# Altium PCB FixBoard.PcbDoc
Units mm, origin at the board's own origin, x right, y up, seen from the top; angles counter-clockwise.
Board outline 70 x 70 mm, 2 copper layers (Top Layer, Bottom Layer); 1 components, 8 nets, 17 pads, 19 vias.
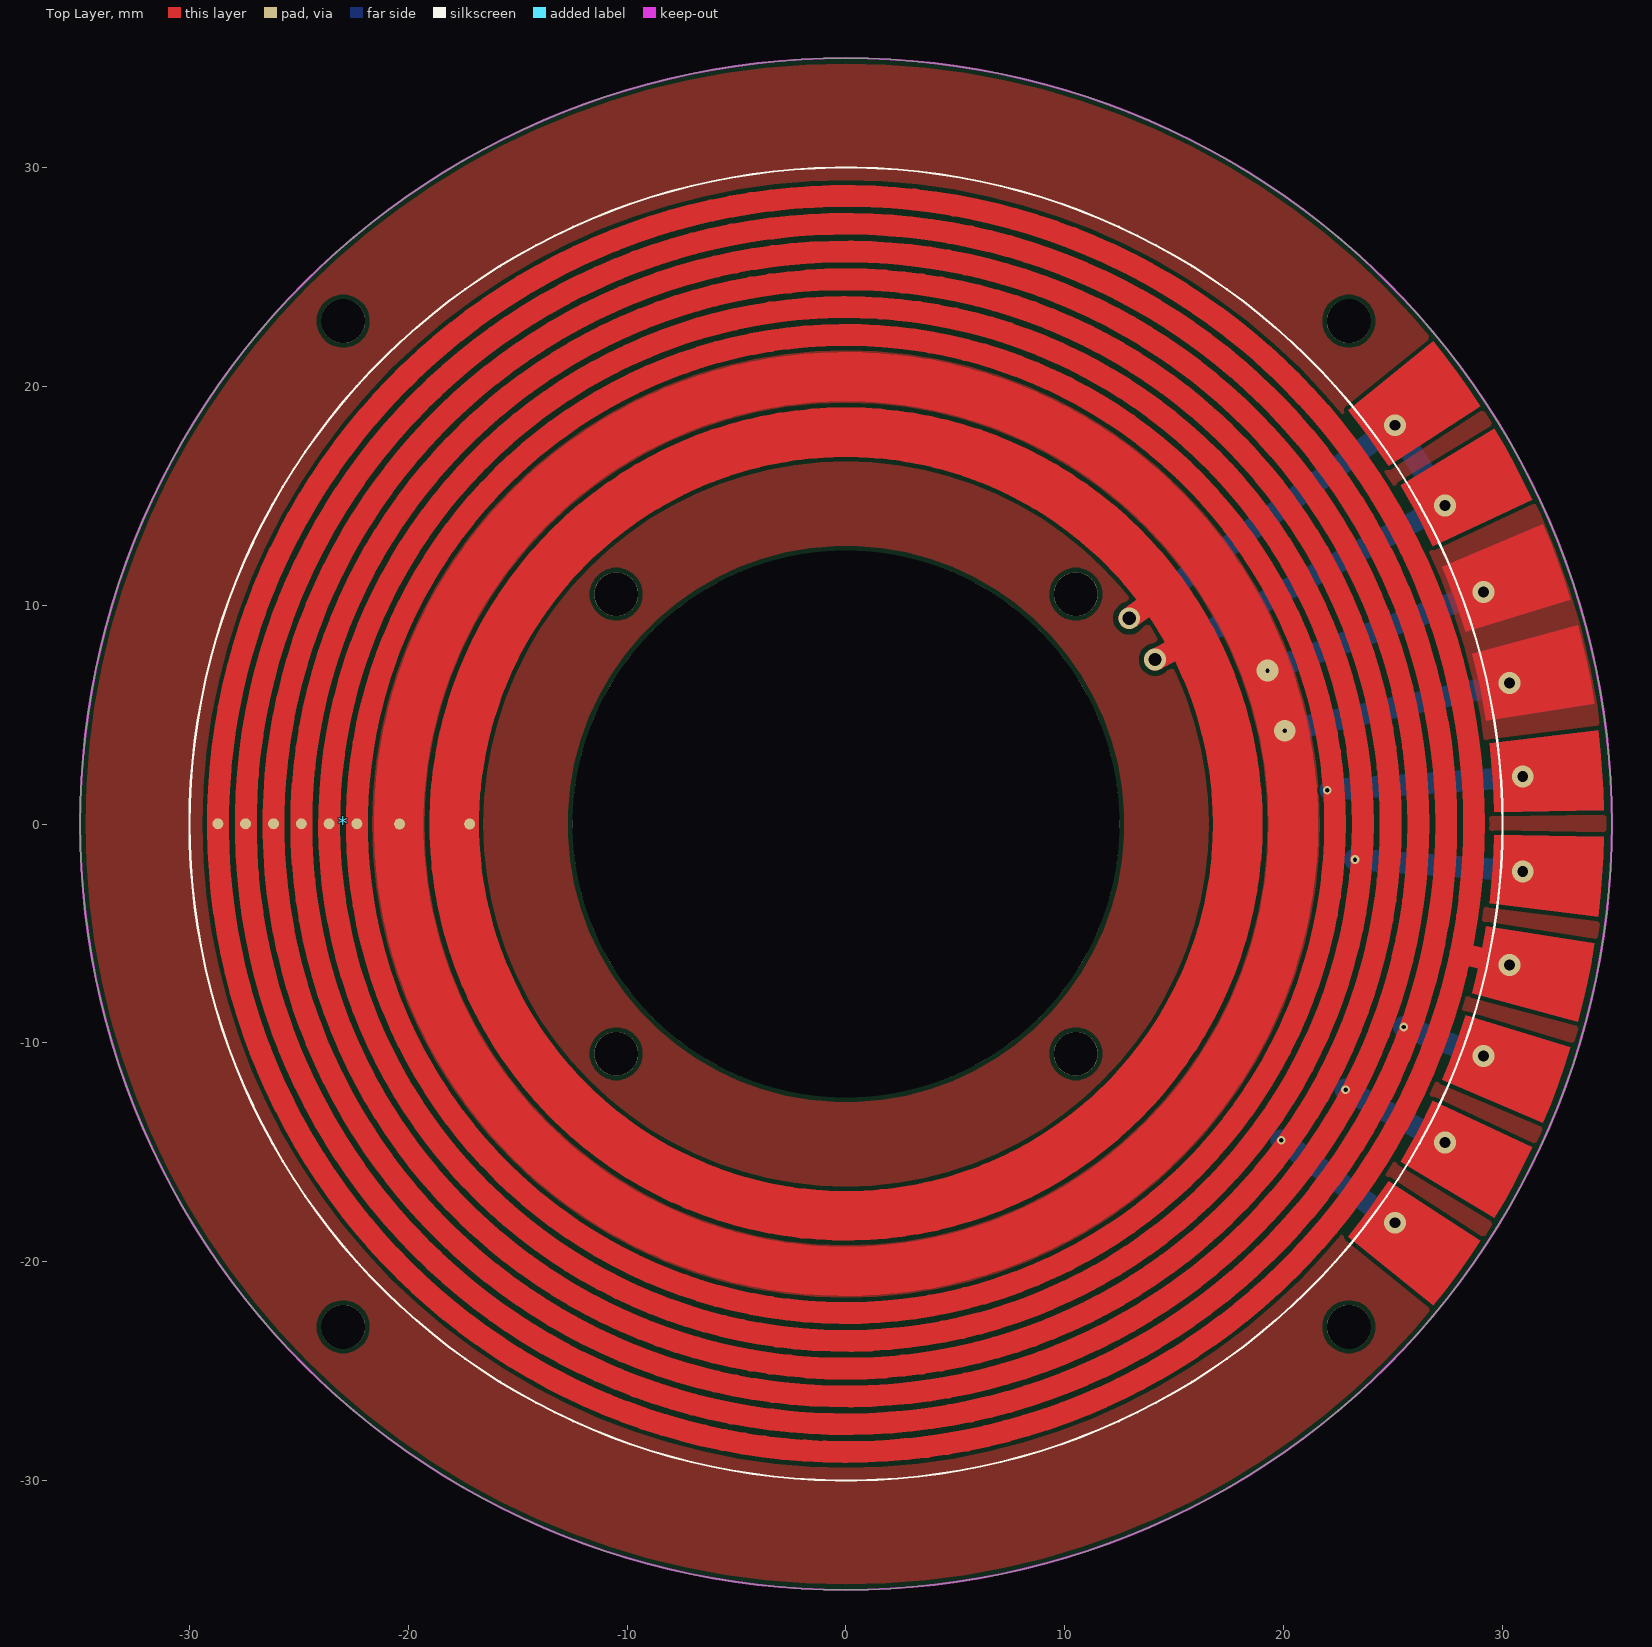
[diagram p0: Top Layer view]
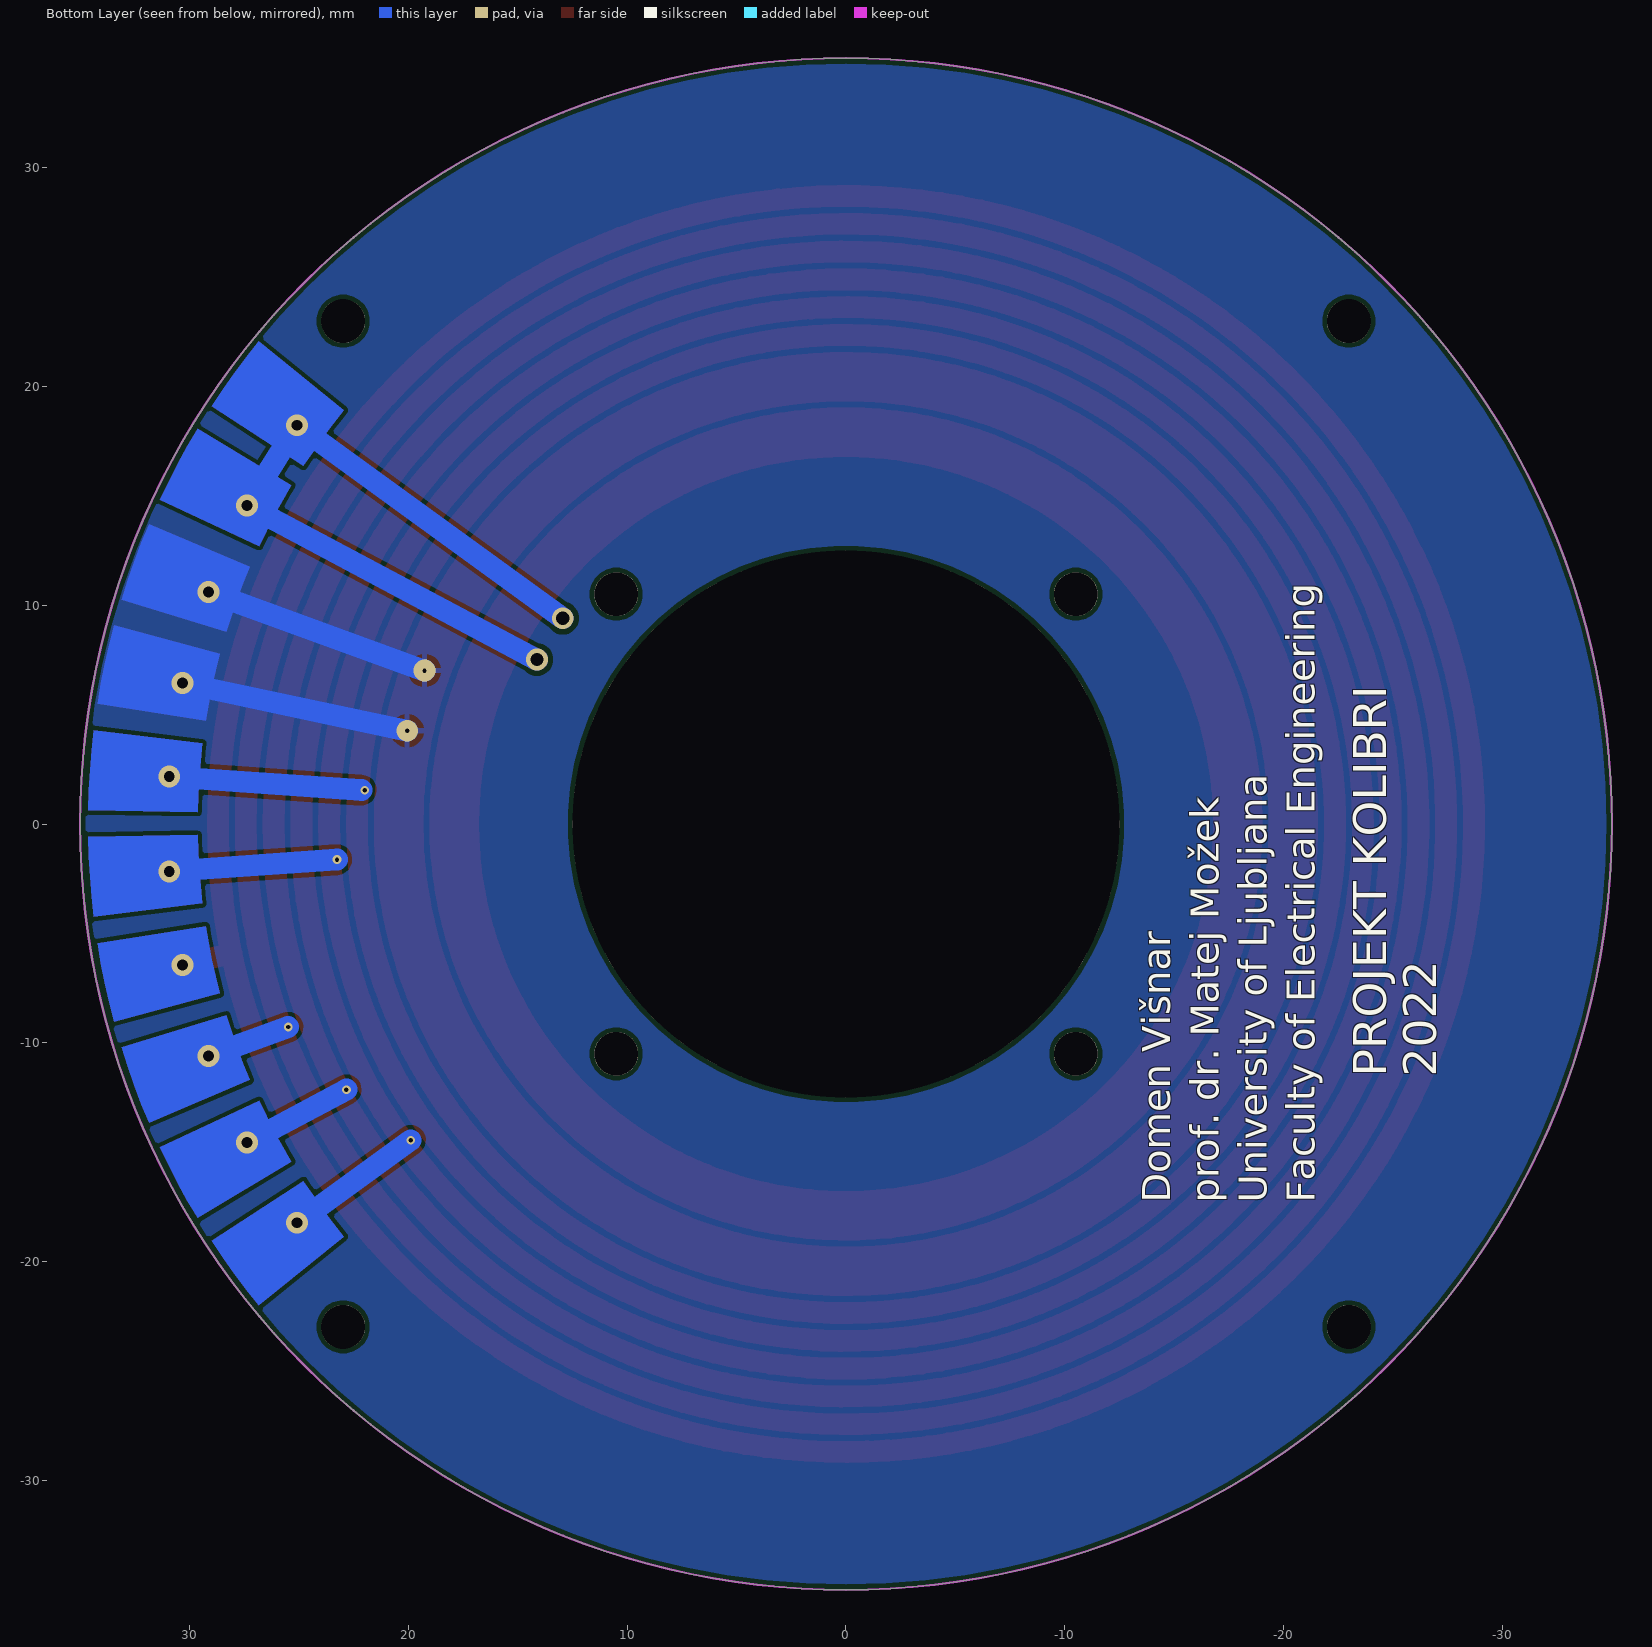
[diagram p1: Bottom Layer view, seen from below]

## Layer stack, top to bottom
Top Solder: solder mask 0.0102, Solder Resist, Dk 3.5
Top Layer: signal copper 0.0356
Dielectric 1: dielectric 0.32, FR-4, Dk 4.8
Bottom Layer: signal copper 0.0356
Bottom Solder: solder mask 0.0102, Solder Resist, Dk 3.5

## Board outline
0,-35 cw(c0,0) -35,0 cw(c0,0) 0,35 cw(c0,0) 35,0 cw(c0,0)

## Design rules (kind name [scope] priority, off if disabled: settings)
Clearance [All] p1: gap=0.2 ignorepadtopadclearanceinfootprint=FALSE except(0: Arc-Hole Track-Hole SMDPad-Hole THPad-Hole Via-Hole Fill-Hole Poly-Hole Region-Hole Text-Hole; 0.1: Arc-Arc Arc-Track Track-Track; 0.127: SMDPad-SMDPad; 0.15: Arc-Text Track-Text SMDPad-Text THPad-Text Via-Text Fill-Text Poly-Text Region-Text Text-Text; 0.254: Arc-THPad Arc-Via Track-THPad Track-Via SMDPad-THPad SMDPad-Via THPad-Via Via-Via Via-Fill Via-Poly Via-Region; 0.5: THPad-THPad)
DiffPairsRouting [All] p1: maxlimit=0.3 minlimit=0.1 mostfreqgap=0.2 toplayer_minwidth=0.1 toplayer_maxwidth=1 toplayer_prefwidth=0.3 bottomlayer_minwidth=0.1 bottomlayer_maxwidth=1 bottomlayer_prefwidth=0.3 maxuncoupledlength=12.7
HoleSize [All] p1: absolutevalues=TRUE maxlimit=6 minlimit=0.2 maxpercent=80.000 minpercent=20.000
HoleToHoleClearance [All] p1: gap=0.5 allowstackedmicrovias=TRUE
MinimumAnnularRing [All] p1: minimumring=0.15
MinimumSolderMaskSliver [All] p1: minsoldermaskwidth=0.2
PolygonConnect [All] p1: connectstyle=Relief reliefconductorwidth=0.254 reliefentries=4 polygonreliefangle="90 Angle" airgapwidth=0.254
RoutingVias [All] p1: holewidth=0.2 width=0.5 viastyle="Through Hole" minholewidth=0.2 minwidth=0.4 maxholewidth=1 maxwidth=2
SolderMaskExpansion [All] p1: expansion=0.102 istentingtop=FALSE
Width [All] p1: maxlimit=10 minlimit=0.1 preferedwidth=0.5
26 further rules are at their usual default settings.

## Components (designator, comment, footprint, x,y, rotation, side; value= is the part's Value field where it differs from the comment)
* "10Pin_SlipRings" 10PIN_SLIPRINGS 0,0 r0 top

## Footprints (in the part's own frame and the unit in brackets; to place one, negate y for a bottom-side part, rotate by r counter-clockwise, add the part's x,y. Pads: shape width x height; smd on the part's side, far side on the other; paste and mask are expansions set on the pad)
10PIN_SLIPRINGS [mm]
  round 0.5 smd: 1(-17.2,0) 3(-20.4,0) 5(-22.35,0.01) 6(-23.62,0.01) 7(-24.89,0.01) 8(-26.16,0.01) 9(-27.44,0.01) 10(-28.7,0.01)
  Top Layer circle w2.27: c0,0 r20.445
  Top Layer circle w1: c0,0 r22.35
  Top Layer circle w1: c0,0 r24.89
  Top Layer circle w1: c0,0 r26.16
  Top Layer circle w1: c0,0 r27.43
  Top Layer lines w1: 22.509,-7.16 ccw(c0,0) 23.62,0 ccw(c0,0) 22.509,-7.16 ; 28.083,-5.918 cw(c0,0) 28.7,0 cw(c0,0) 28.083,-5.918
  Top Layer lines w2.27: 14.485,10.524 cw(c0,0) 15.809,8.406 cw(c0,0) 17.905,0 cw(c0,0) 14.485,10.524

## Free pads (board coordinates)
  round 2 hole 2: 1(-10.5,-10.5) 1(-10.5,10.5) 1(10.5,-10.5) 1(10.5,10.5) 2(-22.981,-22.981) 2(-22.981,22.981) 2(22.981,-22.981) 2(22.981,22.981)
  round 25 hole 25: 1(0,0)

## Via types
v1: diameter 1, hole 0.5, Top Layer to Bottom Layer, 10 vias
v2: diameter 0.4, hole 0.2, Top Layer to Bottom Layer, 5 vias
v3: diameter 1, hole 0.2, Top Layer to Bottom Layer, 2 vias
v4: diameter 1, hole 0.6, Top Layer to Bottom Layer, 2 vias

## Nets (pads, with @x,y where several pads share a name; then routed paths per layer and width w, separated by ;. In a path a pad name is that pad's centre, name@x,y a point inside that pad or via, vN(x,y) a via of type N, cw(c..) or ccw(c..) an arc to the next point about the centre after c; other vN are vias at no path point)
GND: *.3 | length 21
  Bottom Layer w1: v3(19.264,7.011) v1(29.13,10.603) ; v3(20.052,4.262) v1(30.323,6.445)
OUTPUT1: *.5 | length 8.8
  Bottom Layer w1: v2@22.146,1.549 v1(30.925,2.162)
  other v2: 21.993,1.538
OUTPUT2: *.6 | length 7.7
  Bottom Layer w1: v2(23.26,-1.627) v1(30.925,-2.162)
PWM_CH1: *.10 | length 2.3
  Top Layer w1: 28.083,-5.918 v1(30.323,-6.445)
PWM_CH2: *.9 | length 3.9
  Bottom Layer w1: v2(25.491,-9.278) v1(29.13,-10.603)
PWM_CH3: *.8 | length 5.1
  Bottom Layer w1: v2(22.831,-12.139) v1(27.371,-14.554)
PWM_CH4: *.7 | length 6.4
  Bottom Layer w1: v2(19.891,-14.452) v1(25.08,-18.221)
VIN: *.1 | length 38.1
  Top Layer w1: v4(12.944,9.405) 14.485,10.524 ; v4(14.127,7.512) 15.809,8.406
  Bottom Layer w1: v4(12.944,9.405) v1(25.08,18.221) v1(27.371,14.554) v4(14.127,7.512)

## Polygon pours and split planes (outlines as drawn)
GND on Bottom Layer "NONET_L-01_P-001" (solid, pour order 1): -35,0 ccw(c0,0) 0,-35 ccw(c0,0) 35,0 ccw(c0,0) 0,35 ccw(c0,0)
GND on Top Layer "NONET_L-01_P-001" (solid, pour order 0): -35,0 ccw(c0,0) 0,-35 ccw(c0,0) 35,0 ccw(c0,0) 0,35 ccw(c0,0)

## Keep-outs
Keep-Out Layer:
  the board outline again, w0.1

## Other copper
Top Layer:
  region net VIN: 26.82,12.703 31.352,14.816 ccw(c-0.369,0.025) 29.632,18.051 25.346,15.476 cw(c-0.369,0.025)
  region net VIN: 24.791,16.364 28.984,19.087 ccw(c-0.369,0.025) 26.831,22.051 22.945,18.904 cw(c-0.369,0.025)
  region net OUTPUT2: 29.407,-3.631 34.37,-4.241 ccw(c-0.369,0.025) 34.626,-0.586 29.626,-0.499 cw(c-0.369,0.025)
  region net PWM_CH1: 28.609,-7.74 33.438,-9.034 ccw(c-0.369,0.025) 34.2,-5.45 29.262,-4.668 cw(c-0.369,0.025)
  region net PWM_CH2: 27.246,-11.697 31.849,-13.651 ccw(c-0.369,0.025) 33.102,-10.208 28.32,-8.746 cw(c-0.369,0.025)
  region net PWM_CH3: 25.346,-15.426 29.632,-18.002 ccw(c-0.369,0.025) 31.352,-14.767 26.82,-12.654 cw(c-0.369,0.025)
  region net PWM_CH4: 22.945,-18.855 26.831,-22.001 ccw(c-0.369,0.025) 28.984,-19.038 24.791,-16.314 cw(c-0.369,0.025)
  region net OUTPUT1: 29.626,0.548 34.626,0.636 ccw(c-0.369,0.025) 34.37,4.29 29.407,3.681 cw(c-0.369,0.025)
  region net GND: 29.262,4.718 34.2,5.5 ccw(c-0.369,0.025) 33.438,9.083 28.609,7.789 cw(c-0.369,0.025)
  region net GND: 28.32,8.796 33.102,10.258 ccw(c-0.369,0.025) 31.849,13.7 27.246,11.747 cw(c-0.369,0.025)
Bottom Layer:
  region net PWM_CH1: 28.609,-7.74 33.438,-9.034 ccw(c-0.369,0.025) 34.2,-5.45 29.262,-4.668 cw(c-0.369,0.025)
  region net VIN: 24.791,16.364 28.984,19.087 ccw(c-0.369,0.025) 26.831,22.051 22.945,18.904 cw(c-0.369,0.025)
  region net GND: 28.32,8.796 33.102,10.258 ccw(c-0.369,0.025) 31.849,13.7 27.246,11.747 cw(c-0.369,0.025)
  region net VIN: 26.82,12.703 31.352,14.816 ccw(c-0.369,0.025) 29.632,18.051 25.346,15.476 cw(c-0.369,0.025)
  region net OUTPUT1: 29.626,0.548 34.626,0.636 ccw(c-0.369,0.025) 34.37,4.29 29.407,3.681 cw(c-0.369,0.025)
  region net PWM_CH3: 25.346,-15.426 29.632,-18.002 ccw(c-0.369,0.025) 31.352,-14.767 26.82,-12.654 cw(c-0.369,0.025)
  region net OUTPUT2: 29.407,-3.631 34.37,-4.241 ccw(c-0.369,0.025) 34.626,-0.586 29.626,-0.499 cw(c-0.369,0.025)
  region net PWM_CH2: 27.246,-11.697 31.849,-13.651 ccw(c-0.369,0.025) 33.102,-10.208 28.32,-8.746 cw(c-0.369,0.025)
  region net GND: 29.262,4.718 34.2,5.5 ccw(c-0.369,0.025) 33.438,9.083 28.609,7.789 cw(c-0.369,0.025)
  region net PWM_CH4: 22.945,-18.855 26.831,-22.001 ccw(c-0.369,0.025) 28.984,-19.038 24.791,-16.314 cw(c-0.369,0.025)

## Silkscreen, mask and mechanical layers (free items; w line width, h text height)
Top Overlay:
  circle w0.1: c0,0 r30
Bottom Overlay:
  text "PROJEKT KOLIBRI / 2022" at -26.977,-11.542 h1.52 r270
  text "Domen Višnar / prof. dr. Matej Možek / University of Ljubljana / Faculty of Electrical Engineering" at -21.861,-17.3 h2.2 r270
Top Solder:
  region: 22.945,-18.855 26.831,-22.001 ccw(c-0.369,0.025) 28.984,-19.038 24.791,-16.314 cw(c-0.369,0.025)
  region: 25.346,-15.426 29.632,-18.002 ccw(c-0.369,0.025) 31.352,-14.767 26.82,-12.654 cw(c-0.369,0.025)
  region: 27.246,-11.697 31.849,-13.651 ccw(c-0.369,0.025) 33.102,-10.208 28.32,-8.746 cw(c-0.369,0.025)
  region: 28.609,-7.74 33.438,-9.034 ccw(c-0.369,0.025) 34.2,-5.45 29.262,-4.668 cw(c-0.369,0.025)
  region: 29.407,-3.631 34.37,-4.241 ccw(c-0.369,0.025) 34.626,-0.586 29.626,-0.499 cw(c-0.369,0.025)
  region: 29.626,0.548 34.626,0.636 ccw(c-0.369,0.025) 34.37,4.29 29.407,3.681 cw(c-0.369,0.025)
  region: 29.262,4.718 34.2,5.5 ccw(c-0.369,0.025) 33.438,9.083 28.609,7.789 cw(c-0.369,0.025)
  region: 28.32,8.796 33.102,10.258 ccw(c-0.369,0.025) 31.849,13.7 27.246,11.747 cw(c-0.369,0.025)
  region: 26.82,12.703 31.352,14.816 ccw(c-0.369,0.025) 29.632,18.051 25.346,15.476 cw(c-0.369,0.025)
  region: 24.791,16.364 28.984,19.087 ccw(c-0.369,0.025) 26.831,22.051 22.945,18.904 cw(c-0.369,0.025)
Bottom Solder:
  region: 26.82,12.703 31.352,14.816 ccw(c-0.369,0.025) 29.632,18.051 25.346,15.476 cw(c-0.369,0.025)
  region: 24.791,16.364 28.984,19.087 ccw(c-0.369,0.025) 26.831,22.051 22.945,18.904 cw(c-0.369,0.025)
  region: 29.626,0.548 34.626,0.636 ccw(c-0.369,0.025) 34.37,4.29 29.407,3.681 cw(c-0.369,0.025)
  region: 29.262,4.718 34.2,5.5 ccw(c-0.369,0.025) 33.438,9.083 28.609,7.789 cw(c-0.369,0.025)
  region: 28.32,8.796 33.102,10.258 ccw(c-0.369,0.025) 31.849,13.7 27.246,11.747 cw(c-0.369,0.025)
  region: 25.346,-15.426 29.632,-18.002 ccw(c-0.369,0.025) 31.352,-14.767 26.82,-12.654 cw(c-0.369,0.025)
  region: 27.246,-11.697 31.849,-13.651 ccw(c-0.369,0.025) 33.102,-10.208 28.32,-8.746 cw(c-0.369,0.025)
  region: 28.609,-7.74 33.438,-9.034 ccw(c-0.369,0.025) 34.2,-5.45 29.262,-4.668 cw(c-0.369,0.025)
  region: 22.945,-18.855 26.831,-22.001 ccw(c-0.369,0.025) 28.984,-19.038 24.791,-16.314 cw(c-0.369,0.025)
  region: 29.407,-3.631 34.37,-4.241 ccw(c-0.369,0.025) 34.626,-0.586 29.626,-0.499 cw(c-0.369,0.025)